# Altium PCB nanobox_v31.PcbDoc
Units mm, origin at the board's own origin, x right, y up, seen from the top; angles counter-clockwise.
Board outline 38 x 49 mm, 2 copper layers (Top Layer, Bottom Layer), stack 1.569 mm thick; 15 components, 20 nets, 67 pads, 0 vias.
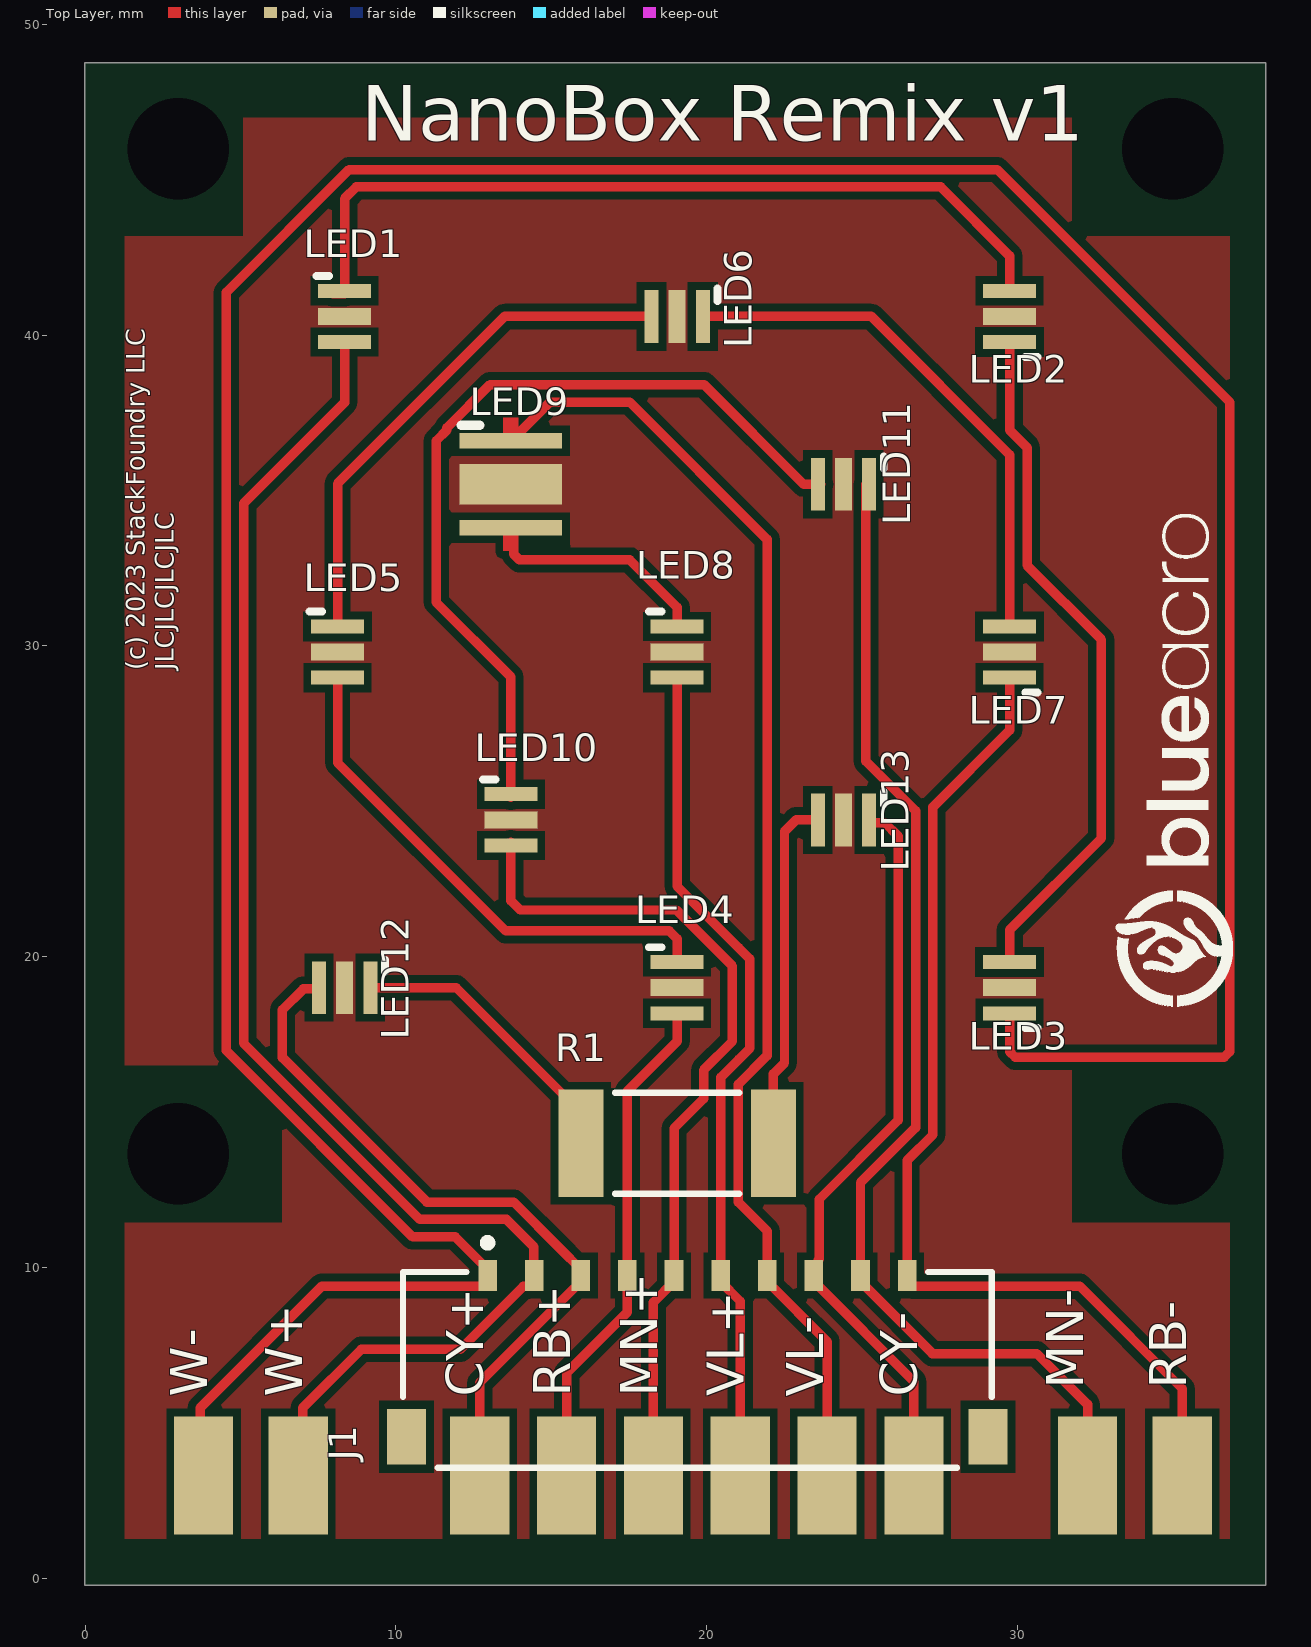
[diagram p0: Top Layer view]
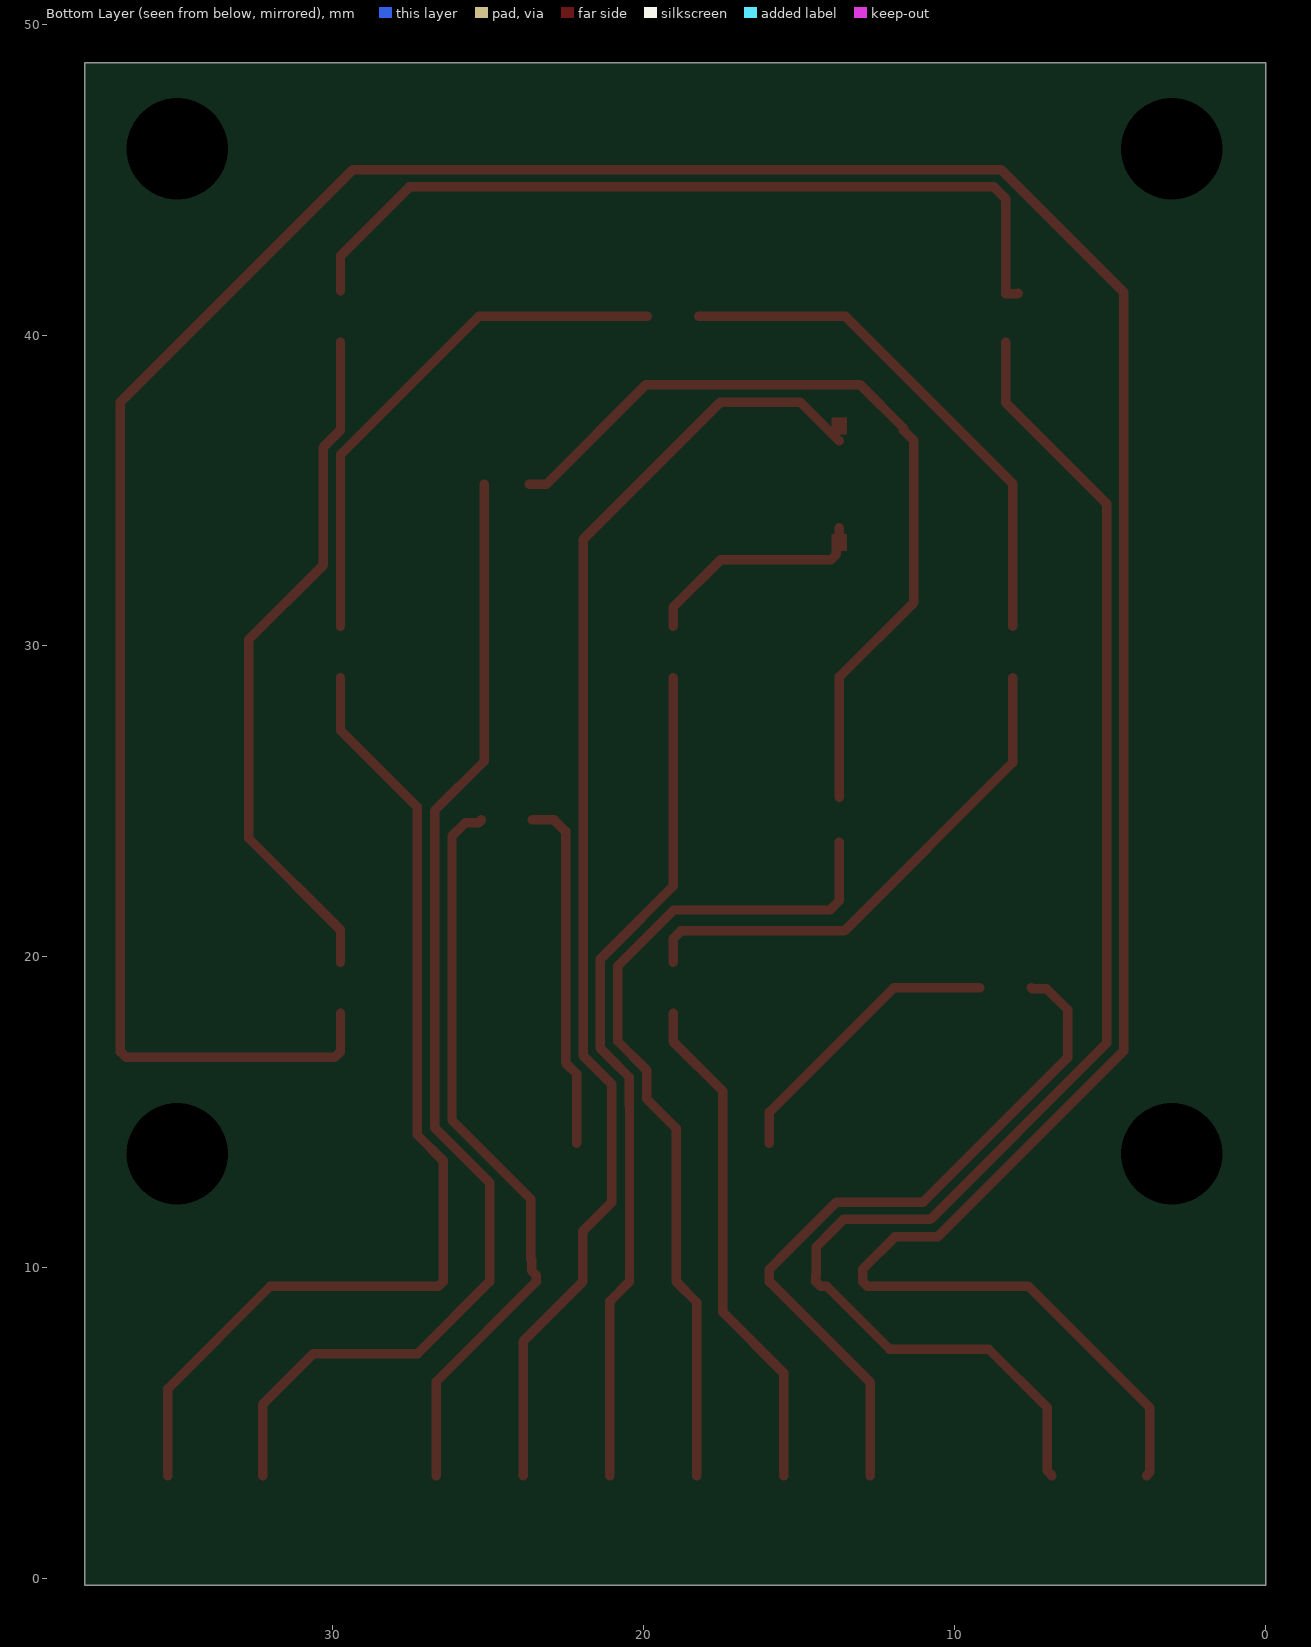
[diagram p1: Bottom Layer view, seen from below]
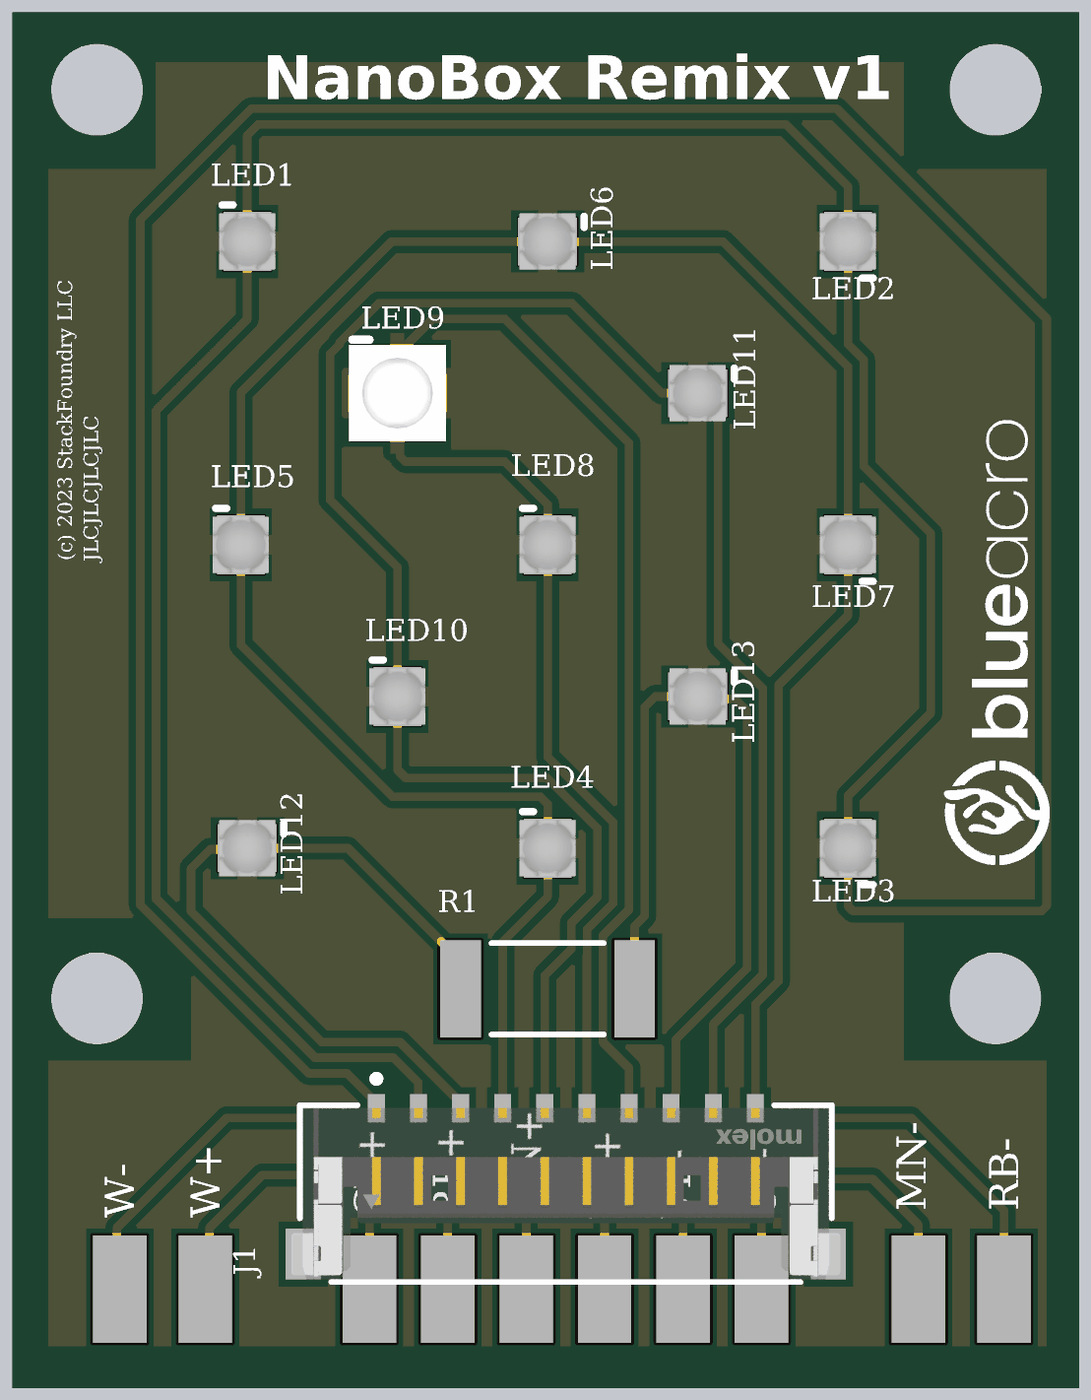
[diagram p2: 3D render of the assembled board from above, using the file's embedded part models]

## Layer stack, top to bottom
Top Solder: solder mask 0.0254, SM-001, Dk 4
Top Layer: signal copper 0.035
Dielectric 1: core 1.4986, Core-043, Dk 4.3
Bottom Layer: signal copper 0.035

## Board outline
-0.016,-0.233 -0.016,48.767 37.984,48.767 37.984,-0.233

## Design rules (kind name [scope] priority, off if disabled: settings)
Clearance [All] p1: gap=0.254 ignorepadtopadclearanceinfootprint=FALSE except(0: Arc-Hole Track-Hole SMDPad-Hole THPad-Hole Via-Hole Fill-Hole Poly-Hole Region-Hole Text-Hole)
PolygonConnect [All] p1: connectstyle=Direct reliefconductorwidth=0.254 reliefentries=4 polygonreliefangle="90 Angle" airgapwidth=0.254
RoutingVias [All] p1: holewidth=0.711 width=1.27 viastyle="Through Hole" minholewidth=0.711 minwidth=1.27 maxholewidth=0.711 maxwidth=1.27
SolderMaskExpansion [All] p1: expansion=0.102 istentingtop=FALSE
Width [All] p1: maxlimit=5 minlimit=0.254 preferedwidth=0.254
30 further rules are at their usual default settings.

## Components (designator, comment, footprint, x,y, rotation, side; value= is the part's Value field where it differs from the comment)
J1 "504050-1091" FP-504050-1091-MFG 19.7,6.7 r180 top
LED1 "L1C1-5790000000000" LUXEON_C_WIDE 8.35,40.6 r90 top
LED2 "L1C1-5790000000000" LUXEON_C_WIDE 29.75,40.6 r270 top
LED3 "L1C1-3090000000000" LUXEON_C_WIDE 29.75,19 r270 top
LED4 "L1C1-RYL1000000000" LUXEON_C_WIDE 19.05,19 r90 top
LED5 "L1C1-RYL1000000000" LUXEON_C_WIDE 8.122,29.8 r90 top
LED6 "L1C1-RYL1000000000" LUXEON_C_WIDE 19.05,40.6 r0 top
LED7 "L1C1-RYL1000000000" LUXEON_C_WIDE 29.75,29.8 r270 top
LED8 "L1C1-VLT1000000000" LUXEON_C_WIDE 19.05,29.8 r90 top
LED9 "LED_THERMAL" VIOSYS_Z5 13.7,35.2 r90 top
LED10 "L1C1-MNT1000000000" LUXEON_C_WIDE 13.7,24.4 r90 top
LED11 "L1C1-MNT1000000000" LUXEON_C_WIDE 24.4,35.2 r0 top
LED12 "L1C1-BLU1000000000" LUXEON_C_WIDE 8.35,19 r0 top
LED13 "L1C1-CYN1000000000" LUXEON_C_WIDE 24.4,24.4 r0 top
R1 "0R 2512 1W" RESC2512(6432)_M 19.05,13.993 r180 top

## Footprints (in the part's own frame and the unit in brackets; to place one, negate y for a bottom-side part, rotate by r counter-clockwise, add the part's x,y. Pads: shape width x height; smd on the part's side, far side on the other; paste and mask are expansions set on the pad)
FP-504050-1091-MFG [mm]
  rect 0.6x1 smd paste+0 mask+0: 1(6.75,-3.04) 2(5.25,-3.04) 3(3.75,-3.04) 4(2.25,-3.04) 5(0.75,-3.04) 6(-0.75,-3.04) 7(-2.25,-3.04) 8(-3.75,-3.04) 9(-5.25,-3.04) 10(-6.75,-3.04)
  rect 1.25x1.8 smd paste+0 mask+0: 11(-9.355,2.15) 12(9.355,2.15)
  silkscreen extent -9.48,-4.21 9.48,3.15, body extent -10.08,-3.64 10.08,3.25, height 0.25
LUXEON_C_WIDE [mm]
  rect 0.45x1.7 smd mask+0.05: A(-0.825,0) C(0.825,0)
  rect 0.55x1.7 smd mask+0.05: PAD(0,0)
  silkscreen extent 1.3,0.5 1.3,0.9, body extent -1,-1 1,1, height 1.36
RESC2512(6432)_M [mm] "Chip Resistor, Body 6.4x3.2mm, IPC Low Density"
  rect 1.45x3.45 smd: 1(-3.1,0) 2(3.1,0)
  silkscreen extent -2,-1.63 2,1.63, body extent -3.25,-1.7 3.25,1.7, height 0.75
VIOSYS_Z5 [mm]
  rect 0.5x3.3 smd: A(-1.4,0) C(1.4,0)
  rect 1.3x3.3 smd: PAD(0,0)
  Top Layer region: 1.6,-0.25 2.15,-0.25 2.15,0.25 1.6,0.25
  Top Layer region: -2.15,-0.25 -1.6,-0.25 -1.6,0.25 -2.15,0.25
  silkscreen extent 1.9,1 1.9,1.6, body extent -1.73,-1.72 1.72,1.73, height 2.01

## Part data
J1: library part CMP-002-00088-1, "Conn Wire to Board HDR 10 POS 1.5mm Solder RA SMD Pico-Lock™ T/R"
LED1 LED2: library part CMP-007-00048-1, "LUXEON C Color High Power LED Emitter Cool White 90 CRI 5700K 80 lm Min 350 mA", Case/Package=SMD/SMT, Color=White, Color Rendering Index (CRI)=90, Correlated Color Temperature (CCT)=5700K, Forward Current=1.05A, Forward Voltage=2.75V, Max Current Rating=1.225A, Design Item ID=LED_THERMAL, Dominant Wavelength=590nm, Lead Free="Lead Free", Source=high-power-led.SCHLIB
LED3: library part CMP-007-00050-1, "LED Chip Warm White 3000K 1225mA 2-Pin SMD T/R", Case/Package=SMD/SMT, Color=White, Color Rendering Index (CRI)=90, Correlated Color Temperature (CCT)=3000k, Forward Current=1.05A, Forward Voltage=2.75V, Max Current Rating=1.225A, Design Item ID=LED_THERMAL, Lead Free="Lead Free", Source=high-power-led.SCHLIB
LED4 LED5 LED6 LED7: library part CMP-007-00039-1, "High Power LEDs - Single Color Royal Blue", Case/Package=SMD/SMT, Color=Blue, Forward Voltage=2.75V, Design Item ID=LED_THERMAL, Lead Free="Lead Free", Source=high-power-led.SCHLIB
LED8: library part CMP-007-00049-1, "LED Uni-Color Violet 430nm 2-Pin SMD EP T/R", Case/Package=SMD/SMT, Color=Violet, Forward Current=1.05A, Forward Voltage=3.5V, Design Item ID=LED_THERMAL, Dominant Wavelength=425nm, Lead Free="Lead Free", Max Current Rating=1.05A, Source=high-power-led.SCHLIB
LED9: library part CMP-124-0001-2, Design Item ID=LED_THERMAL, Source=high-power-led.SCHLIB
LED10 LED11: library part CMP-007-00046-1, "LUXEON C High Power Surface Mount LED Emitter Mint 350 mA 2.75 V", Case/Package=SMD/SMT, Color=Mint, Forward Current=1.05A, Forward Voltage=2.75V, Max Current Rating=1.225A, Design Item ID=LED_THERMAL, Dominant Wavelength=475nm, Lead Free="Lead Free", Source=high-power-led.SCHLIB
LED12: library part CMP-007-00044-1, "LED LUXEON BLUE 470NM L1", Case/Package=SMD/SMT, Color=Blue, Forward Current=1.05A, Forward Voltage=2.9V, Design Item ID=LED_THERMAL, Dominant Wavelength=475nm, Lead Free="Lead Free", Source=high-power-led.SCHLIB
LED13: library part CMP-007-00045-1, "LUXEON C High Power Surface Mount LED Emitter Cyan 350 mA 2.6 V", Case/Package=SMD/SMT, Color=Cyan, Forward Current=1.05A, Forward Voltage=2.6V, Design Item ID=LED_THERMAL, Dominant Wavelength=475nm, Lead Free="Lead Free", Source=high-power-led.SCHLIB
R1: library part CMP-009-00214-1, "Res Thick Film 2512 0 Ohm Molded SMD Automotive Blister T/R"

## Free pads (board coordinates)
  round 0 hole 3.264 unplated: 16(3,46) 17(35,46) 18(35,13.65) 19(3,13.65)
  rect 1.905x3.81 smd: CYN+(12.7,3.302) CYN-(26.67,3.302) MNT+(18.288,3.302) MNT-(32.258,3.302) RB+(15.494,3.302) RB-(35.306,3.302) VLT+(21.082,3.302) VLT-(23.876,3.302) W+(6.858,3.302) W-(3.81,3.302)

## Nets (pads, with @x,y where several pads share a name; then routed paths per layer and width w, separated by ;. In a path a pad name is that pad's centre, name@x,y a point inside that pad or via, vN(x,y) a via of type N, cw(c..) or ccw(c..) an arc to the next point about the centre after c; other vN are vias at no path point)
CYN+: J1.3 LED12.A pad.CYN+ | length 23.4
  Top Layer w0.305: LED12.A 7.484,18.959 7.021,18.959 6.35,18.288 6.35,16.75 11,12.1 13.79,12.1 15.299,10.591 15.95,9.94 J1.3 15.95,9.54 12.7,6.29 pad.CYN+
CYN-: J1.8 LED13.C pad.CYN- | length 24.2
  Top Layer w0.305: LED13.C 25.225,24.382 25.298,24.309 25.729,24.309 26.162,23.876 26.162,14.732 23.622,12.192 23.622,10.266 23.598,10.242 23.598,9.888 J1.8 23.45,9.54 26.67,6.32 pad.CYN-
MNT+: J1.5 LED10.A pad.MNT+ | length 27.3
  Top Layer w0.305: LED10.A@13.7,23.675 13.7,21.8 14,21.5 19.025,21.5 20.828,19.697 20.828,17.276 19.901,16.349 19.901,15.426 18.95,14.475 J1.5 18.95,9.54 18.288,8.878 pad.MNT+
MNT-: J1.9 LED11.C pad.MNT- | length 38.3
  Top Layer w0.305: LED11.C@25.125,35.2 25.125,26.288 26.721,24.692 26.721,14.501 24.95,12.73 24.95,9.54 27.266,7.224 30.623,7.224 32.258,5.588 pad.MNT-
NetLED1_C: LED1.C LED2.A | length 27
  Top Layer w0.305: LED1.C@7.936,41.352 7.963,41.325 LED1.C@8.35,41.325 ; LED1.C 8.35,44.39 8.726,44.766 27.534,44.766 29.75,42.55 LED2.A
NetLED2_C: LED2.C LED3.A | length 22.4
  Top Layer w0.305: LED3.A 29.75,20.86 32.7,23.81 32.7,30.199 30.309,32.59 30.309,36.381 29.75,36.94 LED2.C
NetLED4_C: LED4.C LED5.A | length 16.8
  Top Layer w0.305: LED5.A 8.122,26.239 13.534,20.828 18.796,20.828 19.05,20.574 LED4.C
NetLED5_C: LED5.C LED6.A | length 16.9
  Top Layer w0.305: LED5.C 8.122,35.222 13.5,40.6 LED6.A
NetLED6_C: LED6.C LED7.A | length 17.2
  Top Layer w0.305: LED6.C 25.3,40.6 29.75,36.15 LED7.A
NetLED8_C: LED8.C LED9.A | length 7.5
  Top Layer w0.305: LED9.A 13.7,33.325 13.798,33.227 13.798,32.945 13.976,32.766 17.526,32.766 19.05,31.242 LED8.C
NetLED10_C: LED10.C LED11.A | length 27
  Top Layer w0.305: LED10.C@13.7,25.125 13.7,29 11.3,31.4 11.3,36.6 11.644,36.944 11.644,37.018 13.03,38.405 19.917,38.405 23.121,35.2 LED11.A@23.675,35.2
NetLED12_C: LED12.C R1.2 | length 9.4
  Top Layer w0.305: LED12.C 11.943,19 15.95,14.993 R1.2
NetLED13_A: LED13.A R1.1 | length 11.4
  Top Layer w0.305: R1.1 22.15,16.227 22.504,16.582 22.504,24.028 22.876,24.4 LED13.A
RB+: J1.4 LED4.A pad.RB+ | length 16.3
  Top Layer w0.305: pad.RB+ 15.494,6.604 17.45,8.56 J1.4 17.45,15.672 19.05,17.272 LED4.A
RB-: J1.10 LED7.C pad.RB- | length 33.9
  Top Layer w0.305: LED7.C 29.75,27.285 27.28,24.814 27.28,14.269 26.45,13.439 26.45,9.54 26.598,9.392 32.01,9.392 35.306,6.096 pad.RB-
T: LED1.PAD LED2.PAD LED3.PAD LED4.PAD LED5.PAD LED6.PAD LED7.PAD LED8.PAD LED9.PAD LED10.PAD LED11.PAD LED12.PAD LED13.PAD
VLT+: J1.6 LED8.A pad.VLT+ | length 27.3
  Top Layer w0.305: LED8.A 19.05,22.265 21.032,20.283 21.387,19.928 21.387,17.045 21.032,16.69 20.46,16.118 20.46,15.194 20.45,15.185 J1.6 20.45,9.54 21.082,8.908 pad.VLT+
VLT-: J1.7 LED9.C pad.VLT- | length 42.3
  Top Layer w0.305: LED9.C@13.7,36.592 14.954,37.846 17.526,37.846 21.946,33.426 21.946,16.813 21.019,15.886 21.019,12.099 21.95,11.168 J1.7 21.95,9.54 23.876,7.614 pad.VLT-
W+: J1.2 LED1.A pad.W+ | length 48.5
  Top Layer w0.305: pad.W+ 7.01,3.454 7.01,5.486 8.89,7.366 12.076,7.366 14.102,9.392 14.302,9.392 14.45,9.54 J1.2 14.44,9.75 14.44,10.66 13.9,11.2 13.559,11.541 10.769,11.541 5.1,17.21 5.1,34.581 8.35,37.831 LED1.A
W-: J1.1 LED3.C pad.W- | length 115.6
  Top Layer w0.305: pad.W- 3.708,3.404 3.708,5.486 7.62,9.398 12.802,9.398 12.95,9.546 12.95,9.94 11.908,10.982 10.537,10.982 4.541,16.978 4.541,41.371 8.495,45.325 29.351,45.325 36.83,37.846 36.83,16.943 36.651,16.764 29.929,16.764 29.75,16.943 LED3.C
pads on no net: J1.11 J1.12

## Polygon pours and split planes (outlines as drawn)
T on Top Layer "T_L01_P000" (solid, pour order 0): 1.27,43.18 5.08,43.18 5.08,46.99 31.75,46.99 31.75,43.18 36.83,43.18 36.83,16.51 31.75,16.51 31.75,11.43 36.83,11.43 36.83,1.27 1.27,1.27 1.27,11.43 6.35,11.43 6.35,16.51 1.27,16.51

## Silkscreen, mask and mechanical layers (free items; w line width, h text height)
Top Overlay:
  drawing of 12 lines, arcs and shapes, not listed
  text "NanoBox Remix v1" at 8.89,45.674 h3.05
  text "(c) 2023 StackFoundry LLC" at 2.109,29.21 h1.02 r90
  text "JLCJLCJLCJLC" at 3.041,29.21 h1.02 r90
  text "MN-" at 32.512,6.096 h2.03 r90
  text "RB-" at 35.814,6.096 h2.03 r90
  text "W-" at 4.318,5.842 h2.03 r90
  text "W+" at 7.366,5.842 h2.03 r90
  text "CY+" at 13.194,5.842 h2.03 r90
  text "RB+" at 16.002,5.842 h2.03 r90
  text "MN+" at 18.796,5.842 h2.03 r90
  text "VL+" at 21.577,5.849 h2.03 r90
  text "VL-" at 24.13,5.842 h2.03 r90
  text "CY-" at 27.164,5.842 h2.03 r90